# Altium PCB PCB1.PcbDoc
Units mil, origin at the board's own origin, x right, y up, seen from the top; angles counter-clockwise.
Board outline 6000 x 4000 mil, 2 copper layers (Top Layer, Bottom Layer); 1 components, 0 nets, 6 pads, 0 vias.
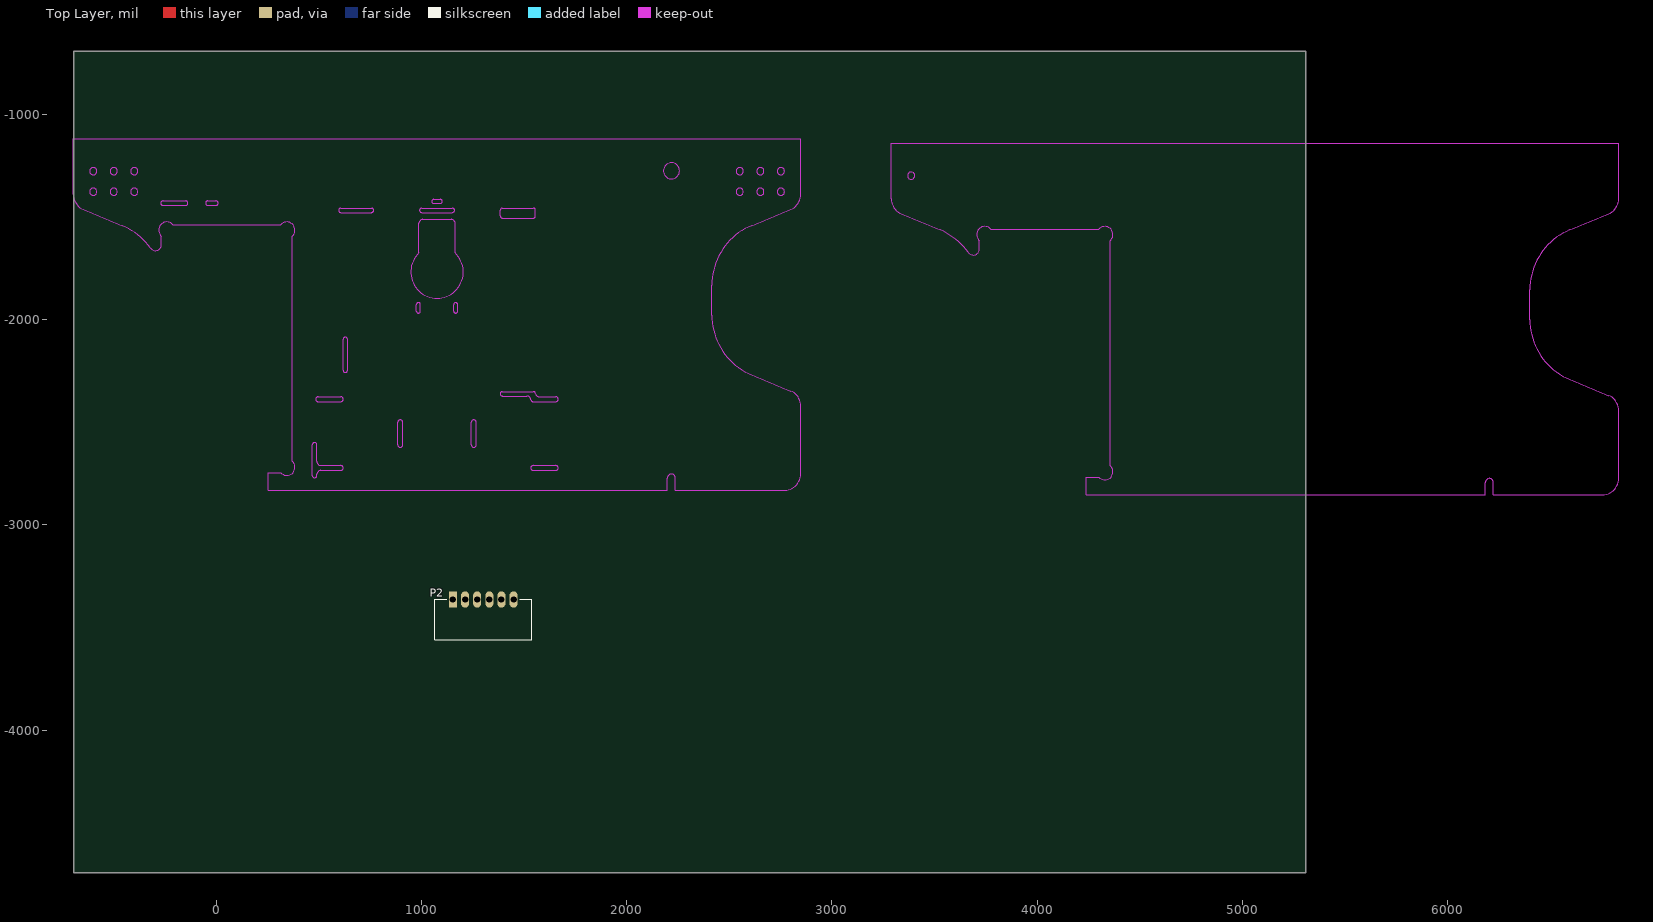
[diagram p0: Top Layer view]
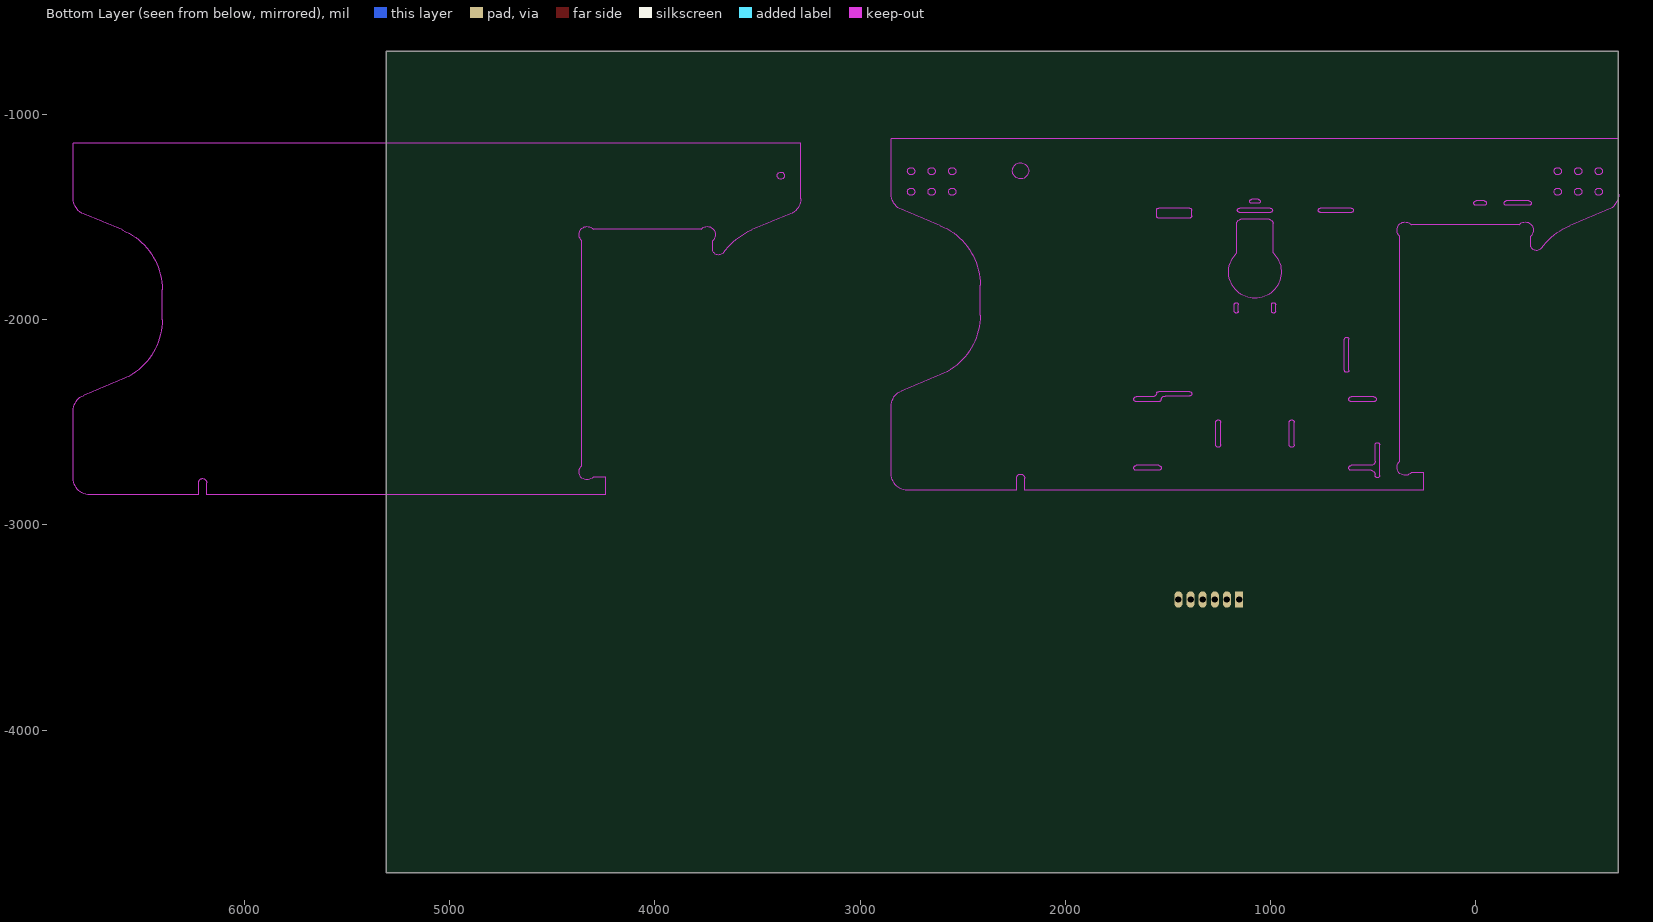
[diagram p1: Bottom Layer view, seen from below]

## Layer stack, top to bottom
Top Solder: solder mask 0.4, Solder Resist, Dk 3.5
Top Layer: signal copper 1.4
Dielectric 1: dielectric 12.6, FR-4, Dk 4.8
Bottom Layer: signal copper 1.4
Bottom Solder: solder mask 0.4, Solder Resist, Dk 3.5

## Board outline
-692.62,-4693.4 5307.38,-4693.4 5307.38,-693.4 -692.62,-693.4

## Design rules (kind name [scope] priority, off if disabled: settings)
Clearance [All] p1: gap=10
PolygonConnect [All] p1: connectstyle=Relief reliefconductorwidth=10 reliefentries=4 polygonreliefangle="90 Angle" airgapwidth=10
RoutingVias [All] p1: holewidth=28 width=50 viastyle="Through Hole" minholewidth=28 minwidth=50 maxholewidth=28 maxwidth=50
SolderMaskExpansion [All] p1: expansion=4
Width [All] p1: maxlimit=10 minlimit=10 preferedwidth=10
30 further rules are at their usual default settings.

## Components (designator, comment, footprint, x,y, rotation, side; value= is the part's Value field where it differs from the comment)
P2 "Header 6" CON6P-ZH1.5 1153.91,-3363.6 r0 top

## Footprints (in the part's own frame and the unit in brackets; to place one, negate y for a bottom-side part, rotate by r counter-clockwise, add the part's x,y. Pads: shape width x height; smd on the part's side, far side on the other; paste and mask are expansions set on the pad)
CON6P-ZH1.5 [mm] "CON6"
  rect 1x2 hole 0.8 paste+0: 1(0,0)
  oval 1x2 hole 0.8 paste+0: 2(1.5,0) 3(3,0) 4(4.5,0) 5(6,0) 6(7.5,0)
  silkscreen extent -2.25,-5 9.75,0

## Part data
P2: "Header, 6-Pin"

## Nets (pads, with @x,y where several pads share a name; then routed paths per layer and width w, separated by ;. In a path a pad name is that pad's centre, name@x,y a point inside that pad or via, vN(x,y) a via of type N, cw(c..) or ccw(c..) an arc to the next point about the centre after c; other vN are vias at no path point)
pads on no net: P2.1 P2.2 P2.3 P2.4 P2.5 P2.6

## Keep-outs
Keep-Out Layer:
  circle w0.5: c3385.68,-1299.27 r17.72
  circle w0.5: c2218.09,-1275.9 r39.37
  circle w0.5: c-598.45,-1377.47 r17.72
  circle w0.5: c2751.16,-1377.47 r17.72
  circle w0.5: c2551.16,-1377.47 r17.72
  circle w0.5: c2651.16,-1377.47 r17.72
  circle w0.5: c-398.45,-1377.47 r17.72
  circle w0.5: c-498.45,-1377.47 r17.72
  circle w0.5: c-398.45,-1277.47 r17.72
  circle w0.5: c-498.45,-1277.47 r17.72
  circle w0.5: c2551.16,-1277.47 r17.72
  circle w0.5: c2651.16,-1277.47 r17.72
  circle w0.5: c2751.16,-1277.47 r17.72
  circle w0.5: c-598.45,-1277.47 r17.72
  lines w0.5: -695.3,-1390.61 ccw(c-616.56,-1390.61) -646.69,-1463.36 -456.66,-1542.07 cw(c-577.19,-1833.06) -319.82,-1651.5 ccw(c-295.69,-1634.48) -266.16,-1634.48 -266.16,-1593.32 cw(c-239.72,-1564.16) -210.55,-1537.71 316.02,-1537.71 cw(c345.19,-1564.16) 371.63,-1593.32 371.63,-2690.76 cw(c345.19,-2719.92) 316.02,-2746.37 253.52,-2746.37 253.52,-2831.02 2198.41,-2831.02 2198.41,-2771.96 cw(c2218.09,-2771.96) 2237.78,-2771.96 2237.78,-2831.02 2769.27,-2831.02 ccw(c2769.27,-2752.28) 2848.01,-2752.28 2848.01,-2421.03 ccw(c2769.27,-2421.03) 2799.41,-2348.28 2609.37,-2269.57 cw(c2729.9,-1978.58) 2414.94,-1978.58 2414.94,-1833.06 cw(c2729.9,-1833.06) 2609.37,-1542.07 2799.41,-1463.36 ccw(c2769.27,-1390.61) 2848.01,-1390.61 2848.01,-1118.42 -695.3,-1118.42 -695.3,-1390.61 ; -258.29,-1444.4 cw(c-258.29,-1433.38) -258.29,-1422.36 -148.05,-1422.36 cw(c-148.05,-1433.38) -148.05,-1444.4 -258.29,-1444.4 ; -39.78,-1444.4 cw(c-39.78,-1433.38) -39.78,-1422.36 -0.41,-1422.36 cw(c-0.41,-1433.38) -0.41,-1444.4 -39.78,-1444.4 ; 468.88,-2760.15 ccw(c479.9,-2760.15) 490.92,-2760.15 490.92,-2754.25 cw(c510.61,-2754.25) 510.61,-2734.56 607.85,-2734.56 ccw(c607.85,-2722.75) 607.85,-2710.94 510.61,-2710.94 cw(c510.61,-2691.25) 490.92,-2691.25 490.92,-2610.54 ccw(c479.9,-2610.54) 468.88,-2610.54 468.88,-2760.15 ; 497.62,-2399.91 cw(c497.62,-2388.1) 497.62,-2376.29 607.85,-2376.29 cw(c607.85,-2388.1) 607.85,-2399.91 497.62,-2399.91 ; 607.85,-1478.65 cw(c607.85,-1467.83) 607.85,-1457 757.46,-1457 cw(c757.46,-1467.83) 757.46,-1478.65 607.85,-1478.65 ; 618.48,-2246.37 ccw(c629.51,-2246.37) 640.53,-2246.37 640.53,-2096.76 ccw(c629.51,-2096.76) 618.48,-2096.76 618.48,-2246.37 ; 885.41,-2610.54 ccw(c897.22,-2610.54) 909.04,-2610.54 909.04,-2500.31 ccw(c897.22,-2500.31) 885.41,-2500.31 885.41,-2610.54 ; 975.96,-1958.97 ccw(c985.81,-1958.97) 995.65,-1958.97 995.65,-1927.47 ccw(c985.81,-1927.47) 975.96,-1927.47 975.96,-1958.97 ; 987.78,-1675.69 ccw(c1076.36,-1768.02) 1164.94,-1675.69 1164.94,-1531.8 ccw(c1145.26,-1531.8) 1145.26,-1512.12 1007.46,-1512.12 ccw(c1007.46,-1531.8) 987.78,-1531.8 987.78,-1675.69 ; 1001.56,-1478.65 cw(c1001.56,-1467.83) 1001.56,-1457 1151.16,-1457 cw(c1151.16,-1467.83) 1151.16,-1478.65 1001.56,-1478.65 ; 1060.61,-1434.51 cw(c1060.61,-1424.67) 1060.61,-1414.82 1092.11,-1414.82 cw(c1092.11,-1424.67) 1092.11,-1434.51 1060.61,-1434.51 ; 1157.07,-1958.97 ccw(c1166.91,-1958.97) 1176.75,-1958.97 1176.75,-1927.47 ccw(c1166.91,-1927.47) 1157.07,-1927.47 1157.07,-1958.97 ; 1243.68,-2610.54 ccw(c1255.49,-2610.54) 1267.3,-2610.54 1267.3,-2500.31 ccw(c1255.49,-2500.31) 1243.68,-2500.31 1243.68,-2610.54 ; 1384.43,-1495.19 ccw(c1395.45,-1495.19) 1395.45,-1506.21 1544.67,-1506.21 ccw(c1544.67,-1495.19) 1555.69,-1495.19 1555.69,-1467.83 ccw(c1544.86,-1467.83) 1544.86,-1457 1395.26,-1457 ccw(c1395.26,-1467.83) 1384.43,-1467.83 1384.43,-1495.19 ; 1395.26,-2372.55 cw(c1395.26,-2361.53) 1395.26,-2350.51 1544.86,-2350.51 cw(c1544.86,-2361.53) 1555.74,-2359.76 ccw(c1575.17,-2356.61) 1575.17,-2376.29 1655.1,-2376.29 cw(c1655.1,-2388.1) 1655.1,-2399.91 1544.86,-2399.91 cw(c1544.86,-2388.1) 1533.15,-2389.65 ccw(c1513.64,-2392.24) 1513.64,-2372.55 1395.26,-2372.55 ; 1544.86,-2734.56 cw(c1544.86,-2722.75) 1544.86,-2710.94 1655.1,-2710.94 cw(c1655.1,-2722.75) 1655.1,-2734.56 1544.86,-2734.56 ; 3288.83,-1412.4 ccw(c3367.57,-1412.4) 3337.43,-1485.15 3527.47,-1563.86 cw(c3406.94,-1854.85) 3664.31,-1673.3 ccw(c3688.43,-1656.27) 3717.96,-1656.27 3717.96,-1615.12 cw(c3744.41,-1585.95) 3773.57,-1559.5 4300.15,-1559.5 cw(c4329.31,-1585.95) 4355.76,-1615.12 4355.76,-2712.55 cw(c4329.31,-2741.72) 4300.15,-2768.17 4237.65,-2768.17 4237.65,-2852.81 6182.53,-2852.81 6182.53,-2793.76 cw(c6202.21,-2793.76) 6221.9,-2793.76 6221.9,-2852.81 6753.4,-2852.81 ccw(c6753.4,-2774.07) 6832.14,-2774.07 6832.14,-2442.83 ccw(c6753.4,-2442.83) 6783.53,-2370.08 6593.5,-2291.37 cw(c6714.03,-2000.38) 6399.06,-2000.38 6399.06,-1854.85 cw(c6714.03,-1854.85) 6593.5,-1563.86 6783.53,-1485.15 ccw(c6753.4,-1412.4) 6832.14,-1412.4 6832.14,-1140.21 3288.83,-1140.21 3288.83,-1412.4